# Altium PCB PCB1.PcbDoc (part 3 of 3)
Units mil, origin at the board's own origin, x right, y up, seen from the top; angles counter-clockwise.
Board outline 3935 x 3335 mil, 2 copper layers (Top Layer, Bottom Layer); 149 components, 220 nets, 928 pads, 357 vias.
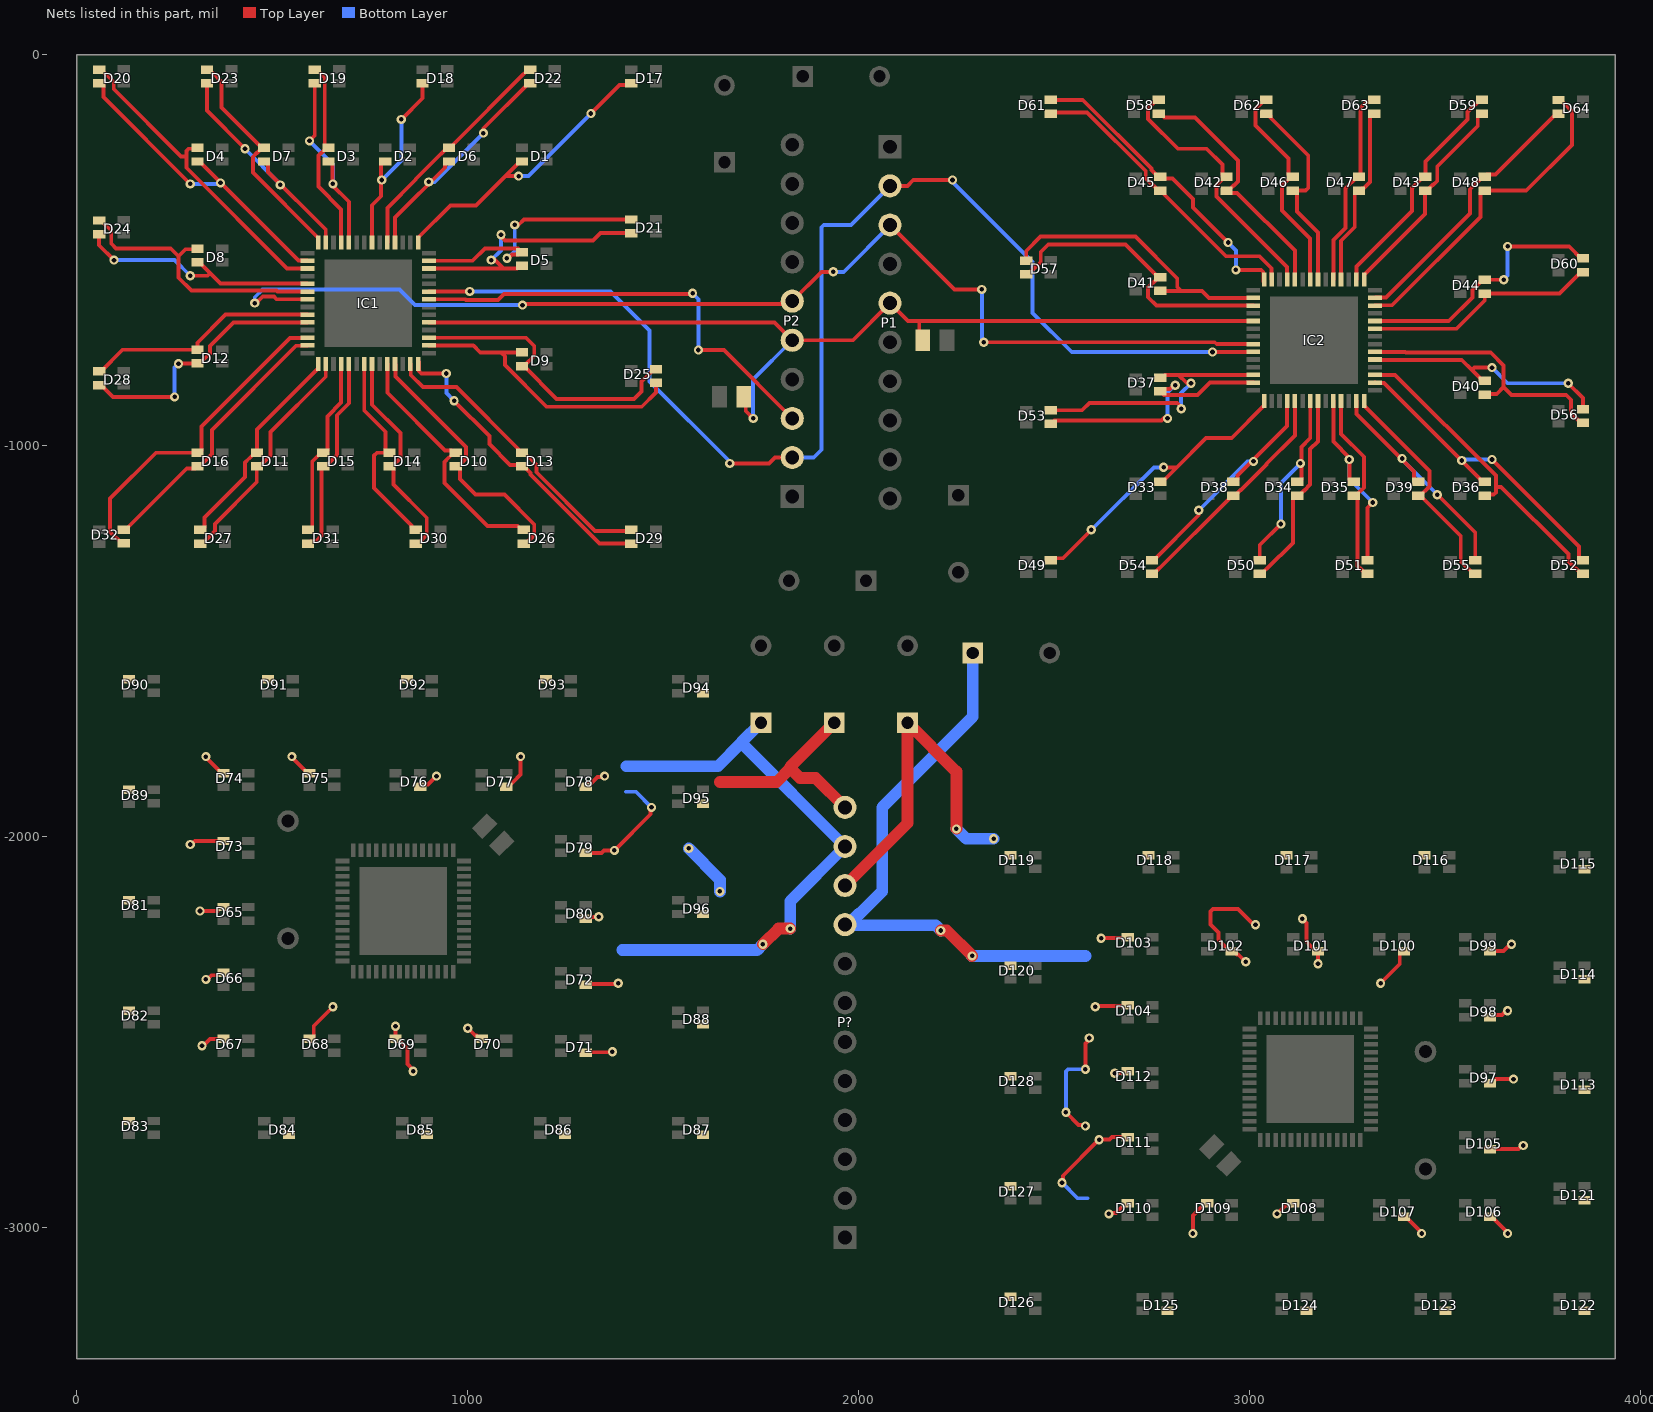
[diagram p3: the nets of this part, all layers, seen from the top]

## Via types
v1: diameter 23.62, hole 11.81, Top Layer to Bottom Layer, 357 vias

## Nets (pads, with @x,y where several pads share a name; then routed paths per layer and width w, separated by ;. In a path a pad name is that pad's centre, name@x,y a point inside that pad or via, vN(x,y) a via of type N, cw(c..) or ccw(c..) an arc to the next point about the centre after c; other vN are vias at no path point) (continued)
OUTG1_1: D34.2 D50.2 IC2.50 | length 513
  Top Layer w10: D50.2@3025.89,-1327.28 3030.82,-1327.28 3043.78,-1314.32 3044.57,-1314.32 3110.75,-1248.15 3110.75,-1133.11 3116.57,-1127.28 D34.2@3121.5,-1127.28 3126.42,-1127.28 3139.38,-1114.32 3140.17,-1114.32 3155,-1099.5 3155,-1008.33 3174.84,-988.49 IC2.50@3174.84,-885.51
OUTG2: D3.2 D19.2 IC1.53 | length 490.9
  Top Layer w10: D19.2@608.41,-37.72 613.33,-37.72 626.29,-50.68 627.08,-50.68 634.15,-57.75 634.15,-233.29 638.58,-237.72 625.62,-250.68 624.83,-250.68 617.76,-257.75 617.76,-337.06 676.1,-395.41 IC1.53@676.1,-479.49
OUTG2_1: D35.2 D51.2 IC2.53 | length 490.9
  Top Layer w10: IC2.53@3233.9,-885.51 3233.9,-969.59 3292.24,-1027.94 3292.24,-1107.25 3285.17,-1114.32 3284.38,-1114.32 3271.42,-1127.28 3275.85,-1131.71 3275.85,-1307.25 3282.92,-1314.32 3283.71,-1314.32 3296.67,-1327.28 D51.2@3301.59,-1327.28
OUTG3: D4.2 D20.2 IC1.3 | length 816.9
  Top Layer w10: D20.2@57.01,-37.72 61.93,-37.72 74.89,-50.68 75.68,-50.68 94.25,-69.24 94.25,-87.68 266.57,-260 280,-260 ; D4.2@308.5,-237.72 306.22,-240 285.86,-240 280,-245.86 280,-260 ; IC1.3@589.49,-546.42 537.63,-546.42 280,-288.79 280,-260
OUTG3_1: D36.2 D52.2 IC2.3 | length 816.9
  Top Layer w10: IC2.3@3320.51,-818.58 3372.37,-818.58 3630,-1076.21 3630,-1105 ; D36.2@3601.5,-1127.28 3603.78,-1125 3624.14,-1125 3630,-1119.14 3630,-1105 ; D52.2@3852.99,-1327.28 3848.07,-1327.28 3835.11,-1314.32 3834.31,-1314.32 3815.75,-1295.76 3815.75,-1277.32 3643.43,-1105 3630,-1105
OUTG4: D5.2 D21.2 IC1.41 | length 702.4
  Top Layer w10: IC1.41@900.51,-526.73 1011.78,-526.73 1043.51,-495 1129.12,-495 D5.2@1138.5,-504.38 ; v1(1100,-520) 1103.69,-520 1113.48,-510.21 1129.79,-510.21 D5.2@1135,-505 ; v1(1120,-435) 1120.86,-435.86 1129.14,-435.86 1143.95,-421.05 D21.2@1418.5,-421.05
  Bottom Layer w10: v1@1096.31,-525 v1@1100,-521.31 ; v1(1100,-520) v1@1100,-521.31 ; v1(1120,-435) 1120,-501.31 v1@1100,-521.31
OUTG4_1: D37.2 D53.2 IC2.41 | length 702.4
  Top Layer w10: D53.2@2491.5,-943.95 2500.45,-935 2775,-935 2780.86,-929.14 2789.14,-929.14 v1(2790,-930) ; D37.2@2771.5,-860.62 2780.88,-870 2866.49,-870 2898.22,-838.27 IC2.41@3009.49,-838.27 ; D37.2@2775,-860 2780.21,-854.79 2796.52,-854.79 2806.31,-845 v1(2810,-845)
  Bottom Layer w10: v1(2790,-930) 2790,-863.69 v1@2810,-843.69 ; v1(2810,-845) v1@2810,-843.69 ; v1@2813.69,-840 v1@2810,-843.69
OUTG5: D6.2 D22.2 IC1.47 | length 602.8
  Top Layer w10: IC1.47@794.21,-479.49 794.21,-391.63 866.81,-319.03 866.81,-317.2 932.12,-251.89 932.91,-251.89 947.09,-237.72 956.93,-237.72 962.76,-231.89 962.76,-229.05 1141.13,-50.68 1141.92,-50.68 1154.88,-37.72 D22.2@1159.8,-37.72
OUTG5_1: D38.2 D54.2 IC2.47 | length 602.8
  Top Layer w10: D54.2@2750.19,-1327.28 2755.12,-1327.28 2768.08,-1314.32 2768.87,-1314.32 2947.24,-1135.95 2947.24,-1133.11 2953.07,-1127.28 2962.91,-1127.28 2977.09,-1113.11 2977.88,-1113.11 3043.19,-1047.8 3043.19,-1045.97 3115.79,-973.37 IC2.47@3115.79,-885.51
OUTG6: D7.2 D23.2 IC1.56 | length 582.9
  Top Layer w10: D23.2@332.71,-37.72 337.63,-37.72 350.59,-50.68 351.38,-50.68 369.95,-69.24 369.95,-134.08 473.58,-237.72 460.62,-250.68 459.83,-250.68 450,-260.5 450,-300.63 617.05,-467.68 IC1.56@617.05,-479.49
OUTG6_1: D39.2 D55.2 IC2.56 | length 582.9
  Top Layer w10: IC2.56@3292.95,-885.51 3292.95,-897.32 3460,-1064.37 3460,-1104.5 3450.17,-1114.32 3449.38,-1114.32 3436.42,-1127.28 3540.05,-1230.92 3540.05,-1295.76 3558.62,-1314.32 3559.41,-1314.32 3572.37,-1327.28 D55.2@3577.29,-1327.28
OUTG7: D8.2 D24.2 IC1.6 | length 716.4
  Top Layer w10: D24.2@57.01,-423.62 61.93,-423.62 74.89,-436.58 75.68,-436.58 87.84,-448.74 87.84,-482.84 100,-495 240,-495 260,-515 ; D8.2@308.5,-496.05 307.31,-497.24 277.76,-497.24 260,-515 ; IC1.6@589.49,-605.47 512.53,-605.47 510.25,-603.19 293.19,-603.19 260,-570 260,-515
OUTG7_1: D40.2 D56.2 IC2.6 | length 716.4
  Top Layer w10: IC2.6@3320.51,-759.53 3397.47,-759.53 3399.75,-761.81 3616.81,-761.81 3650,-795 3650,-850 ; D40.2@3601.5,-868.95 3602.69,-867.76 3632.24,-867.76 3650,-850 ; D56.2@3852.99,-941.38 3848.07,-941.38 3835.11,-928.42 3834.31,-928.42 3822.16,-916.26 3822.16,-882.16 3810,-870 3670,-870 3650,-850
OUTG8: D9.2 D25.2 IC1.30 | length 752
  Top Layer w10: IC1.30@900.51,-743.27 1014.06,-743.27 1031.84,-761.05 1085.17,-761.05 ; D9.2@1138.5,-761.05 1085.17,-761.05 ; D25.2@1481.5,-838.95 1481.5,-863.5 1445,-900 1201.74,-900 1095,-793.26 1095,-770.88 1085.17,-761.05
OUTG8_1: D41.2 D57.2 IC2.30 | length 752
  Top Layer w10: D57.2@2428.5,-526.05 2428.5,-501.5 2465,-465 2708.26,-465 2815,-571.74 2815,-594.12 2824.83,-603.95 ; D41.2@2771.5,-603.95 2824.83,-603.95 ; IC2.30@3009.49,-621.73 2895.94,-621.73 2878.16,-603.95 2824.83,-603.95
OUTG9: D10.2 D26.2 IC1.24 | length 652.5
  Top Layer w10: IC1.24@794.21,-790.51 794.21,-864.21 941.89,-1011.89 958.36,-1011.89 D10.2@964.18,-1017.72 ; D10.2@969.1,-1017.72 D10.2@964.18,-1017.72 ; D26.2@1142.8,-1215 1137.88,-1215 1127.88,-1205 1050,-1205 940,-1095 940,-1041.1 950.43,-1030.68 951.22,-1030.68 D10.2@964.18,-1017.72
OUTG9_1: D42.2 D58.2 IC2.24 | length 652.5
  Top Layer w10: D58.2@2767.19,-150 2772.12,-150 2782.12,-160 2860,-160 2970,-270 2970,-323.9 2959.57,-334.32 2958.78,-334.32 D42.2@2945.82,-347.28 ; D42.2@2940.9,-347.28 D42.2@2945.82,-347.28 ; IC2.24@3115.79,-574.49 3115.79,-500.79 2968.11,-353.11 2951.64,-353.11 D42.2@2945.82,-347.28
OUTG10: D11.2 D27.2 IC1.15 | length 555.5
  Top Layer w10: D27.2@315.71,-1215 320.63,-1215 326.46,-1209.17 326.46,-1183.54 430,-1080 430,-1042.9 441.01,-1031.89 441.81,-1031.89 455.98,-1017.72 D11.2@460.9,-1017.72 460.9,-958.47 617.05,-802.32 IC1.15@617.05,-790.51
OUTG10_1: D43.2 D59.2 IC2.15 | length 555.5
  Top Layer w10: IC2.15@3292.95,-574.49 3292.95,-562.68 3449.1,-406.53 D43.2@3449.1,-347.28 3454.02,-347.28 3468.19,-333.11 3468.99,-333.11 3480,-322.1 3480,-285 3583.54,-181.46 3583.54,-155.83 3589.37,-150 D59.2@3594.29,-150
OUTG11: D12.2 D28.2 IC1.9 | length 603
  Top Layer w10: D28.2@57.01,-809.53 61.93,-809.53 117.07,-754.38 D12.2@308.5,-754.38 308.5,-736.5 380.47,-664.53 IC1.9@589.49,-664.53
OUTG11_1: D44.2 D60.2 IC2.9 | length 603
  Top Layer w10: IC2.9@3320.51,-700.47 3529.53,-700.47 3601.5,-628.5 D44.2@3601.5,-610.62 3792.93,-610.62 3848.07,-555.47 D60.2@3852.99,-555.47
OUTG12: D13.2 D29.2 IC1.27 | length 769.8
  Top Layer w10: IC1.27@853.27,-790.51 854.17,-791.42 854.17,-819.17 885,-850 970.79,-850 D13.2@1138.5,-1017.72 ; D13.2@1140,-1015 1140.71,-1015 1157.6,-1031.89 1158.39,-1031.89 1175.75,-1049.24 1175.75,-1067.68 1325.56,-1217.5 1416,-1217.5 D29.2@1418.5,-1215
OUTG12_1: D45.2 D61.2 IC2.27 | length 769.8
  Top Layer w10: D61.2@2491.5,-150 2494,-147.5 2584.44,-147.5 2734.25,-297.32 2734.25,-315.76 2751.61,-333.11 2752.4,-333.11 2769.29,-350 D45.2@2770,-350 ; D45.2@2771.5,-347.28 2939.21,-515 3025,-515 3055.83,-545.83 3055.83,-573.58 IC2.27@3056.73,-574.49
OUTG13: D14.2 D30.2 IC1.21 | length 526.9
  Top Layer w10: IC1.21@735.16,-790.51 735.16,-910.16 788.96,-963.96 788.96,-1011.89 794.78,-1017.72 767.28,-1017.72 760,-1025 760,-1107.89 856.36,-1204.25 856.36,-1209.17 862.18,-1215 D30.2@867.11,-1215
OUTG13_1: D46.2 D62.2 IC2.21 | length 526.9
  Top Layer w10: D62.2@3042.89,-150 3047.82,-150 3053.64,-155.83 3053.64,-160.75 3150,-257.11 3150,-340 3142.72,-347.28 3115.22,-347.28 3121.04,-353.11 3121.04,-401.04 3174.84,-454.84 IC2.21@3174.84,-574.49
OUTG14: D15.2 D31.2 IC1.18 | length 468.7
  Top Layer w10: D31.2@591.41,-1215 596.33,-1215 602.15,-1209.17 602.15,-1040.15 618.76,-1023.54 624.48,-1023.54 D15.2@630.3,-1017.72 635.23,-1017.72 641.05,-1011.89 641.05,-924.63 676.1,-889.58 IC1.18@676.1,-790.51
OUTG14_1: D47.2 D63.2 IC2.18 | length 468.7
  Top Layer w10: IC2.18@3233.9,-574.49 3233.9,-475.42 3268.95,-440.37 3268.95,-353.11 3274.77,-347.28 D47.2@3279.7,-347.28 3285.52,-341.46 3291.24,-341.46 3307.85,-324.85 3307.85,-155.83 3313.67,-150 D63.2@3318.59,-150
OUTG15: D16.2 D32.2 IC1.12 | length 843.1
  Top Layer w10: D32.2@120,-1249.57 115.08,-1249.57 102.12,-1236.61 101.32,-1236.61 85,-1220.28 85,-1135 202.28,-1017.72 D16.2@308.5,-1017.72 313.43,-1017.72 319.25,-1011.89 319.25,-950.75 545.51,-724.49 588.58,-724.49 IC1.12@589.49,-723.58
OUTG15_1: D48.2 D64.2 IC2.12 | length 843.1
  Top Layer w10: IC2.12@3320.51,-641.42 3321.42,-640.51 3364.49,-640.51 3590.75,-414.25 3590.75,-353.11 3596.57,-347.28 D48.2@3601.5,-347.28 3707.72,-347.28 3825,-230 3825,-144.72 3808.68,-128.39 3807.88,-128.39 3794.92,-115.43 D64.2@3790,-115.43
OUTR0: D1.1 D17.1 IC1.43 | length 778.6
  Top Layer w10: IC1.43@872.95,-479.49 872.95,-467.68 955.63,-385 1021.3,-385 1096.3,-310 ; v1(1130,-310) 1096.3,-310 ; D1.1@1138.5,-272.72 1133.58,-272.72 1096.3,-310 ; v1(1315,-150) 1387.76,-77.24 1413.98,-77.24 D17.1@1418.5,-72.72
  Bottom Layer w10: v1(1130,-310) 1155,-310 v1(1315,-150)
OUTR0_1: D33.1 D49.1 IC2.43 | length 778.6
  Top Layer w10: D49.1@2491.5,-1292.28 2496.02,-1287.76 2522.24,-1287.76 v1(2595,-1215) ; D33.1@2771.5,-1092.28 2776.42,-1092.28 2813.7,-1055 ; v1(2780,-1055) 2813.7,-1055 ; IC2.43@3037.05,-885.51 3037.05,-897.32 2954.37,-980 2888.7,-980 2813.7,-1055
  Bottom Layer w10: v1(2595,-1215) 2755,-1055 v1(2780,-1055)
OUTR1: D2.1 D18.1 IC1.49 | length 514
  Top Layer w10: IC1.49@754.84,-479.49 754.84,-384.57 777.76,-361.65 777.76,-278.54 783.58,-272.72 D2.1@788.5,-272.72 ; v1(830,-165) 884.11,-110.89 D18.1@884.11,-72.72
  Bottom Layer w10: v1(780,-320) 830,-270 v1(830,-165)
OUTR1_1: D34.1 D50.1 IC2.49 | length 514
  Top Layer w10: D50.1@3025.89,-1292.28 3025.89,-1254.11 v1(3080,-1200) ; D34.1@3121.5,-1092.28 3126.42,-1092.28 3132.24,-1086.46 3132.24,-1045 3132.24,-1003.35 3155.16,-980.43 IC2.49@3155.16,-885.51
  Bottom Layer w10: v1(3080,-1200) 3080,-1095 v1(3130,-1045)
OUTR2: D3.1 D19.1 IC1.52 | length 519
  Top Layer w10: v1(595,-220) 608.41,-206.59 D19.1@608.41,-72.72 ; D3.1@643.5,-272.72 648.43,-272.72 654.25,-278.54 654.25,-334.25 695.79,-375.79 IC1.52@695.79,-479.49
  Bottom Layer w10: v1(595,-220) 655,-280 v1(655,-330)
OUTR2_1: D35.1 D51.1 IC2.52 | length 519
  Top Layer w10: IC2.52@3214.21,-885.51 3214.21,-989.21 3255.75,-1030.75 3255.75,-1086.46 3261.57,-1092.28 D35.1@3266.5,-1092.28 ; D51.1@3301.59,-1292.28 3301.59,-1158.41 v1(3315,-1145)
  Bottom Layer w10: v1(3255,-1035) 3255,-1085 v1(3315,-1145)
OUTR3: D4.1 D20.1 IC1.2 | length 824.9
  Top Layer w10: D20.1@57.01,-72.72 61.93,-72.72 67.76,-78.54 67.76,-107.76 v1(290,-330) ; D4.1@308.5,-272.72 313.43,-272.72 566.54,-525.83 588.58,-525.83 IC1.2@589.49,-526.73
  Bottom Layer w10: v1(290,-330) 365,-330 v1@370,-325
  other v1: 367.5,-327.5
OUTR3_1: D36.1 D52.1 IC2.2 | length 824.9
  Top Layer w10: IC2.2@3320.51,-838.27 3321.42,-839.17 3343.46,-839.17 3542.15,-1037.85 3596.57,-1092.28 D36.1@3601.5,-1092.28 ; v1(3620,-1035) 3842.24,-1257.24 3842.24,-1286.46 3848.07,-1292.28 D52.1@3852.99,-1292.28
  Bottom Layer w10: v1@3540,-1040 3545,-1035 v1(3620,-1035)
  other v1: 3542.5,-1037.5
OUTR4: D5.1 D21.1 IC1.40 | length 707
  Top Layer w10: IC1.40@900.51,-546.42 1091.42,-546.42 ; v1(1060,-525) 1070,-525 1091.42,-546.42 ; v1(1085,-460) 1085,-465 1095,-475 1320,-475 1338.95,-456.05 D21.1@1418.5,-456.05 ; D5.1@1138.5,-539.38 1133.58,-539.38 1126.55,-546.42 1091.42,-546.42
  Bottom Layer w10: v1(1060,-525) 1085,-500 v1(1085,-460)
OUTR4_1: D37.1 D53.1 IC2.40 | length 707
  Top Layer w10: D53.1@2491.5,-908.95 2571.05,-908.95 2590,-890 2815,-890 2825,-900 v1(2825,-905) ; D37.1@2771.5,-825.62 2776.42,-825.62 2783.45,-818.58 2818.58,-818.58 ; v1(2850,-840) 2840,-840 2818.58,-818.58 ; IC2.40@3009.49,-818.58 2818.58,-818.58
  Bottom Layer w10: v1(2825,-905) 2825,-865 v1(2850,-840)
OUTR5: D6.1 D22.1 IC1.46 | length 638.4
  Top Layer w10: IC1.46@813.9,-479.49 813.9,-416.1 941.26,-288.74 941.26,-278.54 947.09,-272.72 D6.1@952.01,-272.72 ; v1(1040,-200) 1040,-187.6 1154.88,-72.72 D22.1@1159.8,-72.72
  Bottom Layer w10: v1(900,-325) 915,-325 v1(1040,-200)
OUTR5_1: D38.1 D54.1 IC2.46 | length 638.4
  Top Layer w10: D54.1@2750.19,-1292.28 2755.12,-1292.28 2870,-1177.4 v1(2870,-1165) ; D38.1@2957.99,-1092.28 2962.91,-1092.28 2968.74,-1086.46 2968.74,-1076.26 3007.5,-1037.5 3096.1,-948.9 IC2.46@3096.1,-885.51
  Bottom Layer w10: v1(2870,-1165) 2995,-1040 v1(3010,-1040)
OUTR6: D7.1 D23.1 IC1.55 | length 615.1
  Top Layer w10: D23.1@332.71,-72.72 332.71,-142.71 v1(430,-240) ; D7.1@478.5,-272.72 483.43,-272.72 489.25,-278.54 489.25,-299.37 636.65,-446.77 636.65,-479.41 IC1.55@636.73,-479.49
  Bottom Layer w10: v1(430,-240) 520,-330 v1@520,-335
  other v1: 520,-332.5
OUTR6_1: D39.1 D55.1 IC2.55 | length 615.1
  Top Layer w10: IC2.55@3273.27,-885.51 3273.35,-885.59 3273.35,-918.23 3388.81,-1033.69 3420.75,-1065.63 3420.75,-1086.46 3426.57,-1092.28 D39.1@3431.5,-1092.28 ; v1(3480,-1125) 3577.29,-1222.29 D55.1@3577.29,-1292.28
  Bottom Layer w10: v1@3390,-1030 3390,-1035 v1(3480,-1125)
  other v1: 3390,-1032.5
OUTR7: D8.1 D24.1 IC1.5 | length 650.9
  Top Layer w10: D24.1@57.01,-458.62 57.01,-487.01 v1(95,-525) ; v1(290,-565) 334.21,-565 340.79,-558.42 ; D8.1@308.5,-531.05 313.43,-531.05 340.79,-558.42 ; IC1.5@589.49,-585.79 588.7,-585 367.37,-585 340.79,-558.42
  Bottom Layer w10: v1(95,-525) 250,-525 v1(290,-565)
OUTR7_1: D40.1 D56.1 IC2.5 | length 650.9
  Top Layer w10: IC2.5@3320.51,-779.21 3321.3,-780 3542.63,-780 3569.21,-806.58 ; D40.1@3601.5,-833.95 3596.57,-833.95 3569.21,-806.58 ; v1(3620,-800) 3575.79,-800 3569.21,-806.58 ; v1(3815,-840) 3852.99,-877.99 D56.1@3852.99,-906.38
  Bottom Layer w10: v1(3620,-800) 3660,-840 v1(3815,-840)
OUTR8: D9.1 D25.1 IC1.31 | length 765
  Top Layer w10: IC1.31@900.51,-723.58 1148.58,-723.58 1170,-745 1170,-770.27 1157.18,-783.09 1156.39,-783.09 D9.1@1143.43,-796.05 ; D9.1@1138.5,-796.05 D9.1@1143.43,-796.05 ; D25.1@1481.5,-803.95 1476.57,-803.95 1463.61,-816.91 1462.82,-816.91 1444.25,-835.48 1444.25,-860.75 1425,-880 1227.38,-880 D9.1@1143.43,-796.05
OUTR8_1: D41.1 D57.1 IC2.31 | length 765
  Top Layer w10: D57.1@2428.5,-561.05 2433.43,-561.05 2446.39,-548.09 2447.18,-548.09 2465.75,-529.52 2465.75,-504.25 2485,-485 2682.62,-485 D41.1@2766.57,-568.95 ; D41.1@2771.5,-568.95 D41.1@2766.57,-568.95 ; IC2.31@3009.49,-641.42 2761.42,-641.42 2740,-620 2740,-594.73 2752.82,-581.91 2753.61,-581.91 D41.1@2766.57,-568.95
OUTR9: D10.1 D26.1 IC1.25 | length 687.4
  Top Layer w10: IC1.25@813.9,-790.51 814.8,-791.42 814.8,-822.7 995,-1002.89 995,-1032.54 987.78,-1039.76 986.99,-1039.76 D10.1@974.03,-1052.72 ; D10.1@969.1,-1052.72 D10.1@974.03,-1052.72 ; D26.1@1142.8,-1250 1147.73,-1250 1160.69,-1237.04 1161.48,-1237.04 1170,-1228.52 1170,-1201.48 1093.52,-1125 1020,-1125 979.85,-1084.85 979.85,-1058.54 D10.1@974.03,-1052.72
OUTR9_1: D42.1 D58.1 IC2.25 | length 687.4
  Top Layer w10: D58.1@2767.19,-115 2762.27,-115 2749.31,-127.96 2748.52,-127.96 2740,-136.48 2740,-163.52 2816.48,-240 2890,-240 2930.15,-280.15 2930.15,-306.46 D42.1@2935.97,-312.28 ; D42.1@2940.9,-312.28 D42.1@2935.97,-312.28 ; IC2.25@3096.1,-574.49 3095.2,-573.58 3095.2,-542.3 2915,-362.11 2915,-332.46 2922.22,-325.24 2923.01,-325.24 D42.1@2935.97,-312.28
OUTR10: D11.1 D27.1 IC1.16 | length 599.2
  Top Layer w10: D27.1@315.71,-1250 320.63,-1250 333.59,-1237.04 334.38,-1237.04 352.95,-1218.47 352.95,-1199.6 460,-1092.55 460,-1053.62 D11.1@460.9,-1052.72 465.83,-1052.72 478.79,-1039.76 479.58,-1039.76 494.79,-1024.55 494.79,-965.21 636.73,-823.27 IC1.16@636.73,-790.51
OUTR10_1: D43.1 D59.1 IC2.16 | length 599.2
  Top Layer w10: IC2.16@3273.27,-574.49 3273.27,-541.73 3415.21,-399.79 3415.21,-340.45 3430.42,-325.24 3431.21,-325.24 3444.17,-312.28 D43.1@3449.1,-312.28 3450,-311.38 3450,-272.45 3557.05,-165.4 3557.05,-146.53 3575.61,-127.96 3576.41,-127.96 3589.37,-115 D59.1@3594.29,-115
OUTR11: D12.1 D28.1 IC1.10 | length 679.1
  Top Layer w10: D28.1@57.01,-844.53 61.93,-844.53 92.4,-875 v1(250,-875) ; v1(260,-790) 260.31,-789.69 308.2,-789.69 D12.1@308.5,-789.38 313.43,-789.38 327.6,-775.21 328.39,-775.21 340,-763.6 340,-744.73 400.52,-684.21 IC1.10@589.49,-684.21
  Bottom Layer w10: v1(250,-875) 250,-800 v1(260,-790)
OUTR11_1: D44.1 D60.1 IC2.10 | length 679.1
  Top Layer w10: IC2.10@3320.51,-680.79 3509.48,-680.79 3570,-620.27 3570,-601.4 3581.61,-589.79 3582.4,-589.79 3596.57,-575.62 D44.1@3601.5,-575.62 3601.8,-575.31 3649.69,-575.31 v1(3650,-575) ; v1(3660,-490) 3817.6,-490 3848.07,-520.47 D60.1@3852.99,-520.47
  Bottom Layer w10: v1(3650,-575) 3660,-565 v1(3660,-490)
OUTR12: D13.1 D29.1 IC1.28 | length 794
  Top Layer w10: IC1.28@875,-785 875,-809.14 880.86,-815 v1(945,-815) ; v1(965,-885) 1055,-975 1055,-995.85 1107.76,-1048.6 1134.39,-1048.6 D13.1@1138.5,-1052.72 1143.43,-1052.72 1160.75,-1070.04 1160.75,-1073.9 1336.85,-1250 D29.1@1418.5,-1250
  Bottom Layer w10: v1(945,-815) 945,-865 v1(965,-885)
OUTR12_1: D45.1 D61.1 IC2.28 | length 794
  Top Layer w10: D61.1@2491.5,-115 2573.15,-115 2749.25,-291.1 2749.25,-294.96 2766.57,-312.28 D45.1@2771.5,-312.28 2775.61,-316.4 2802.24,-316.4 2855,-369.15 2855,-390 v1(2945,-480) ; v1(2965,-550) 3029.14,-550 3035,-555.86 3035,-574.49 IC2.28@3035,-580
  Bottom Layer w10: v1(2945,-480) 2965,-500 v1(2965,-550)
OUTR13: D14.1 D30.1 IC1.22 | length 556.7
  Top Layer w10: IC1.22@754.84,-790.51 755,-790.67 755,-895 827.43,-967.43 827.43,-1030.71 818.38,-1039.76 817.59,-1039.76 D14.1@804.63,-1052.72 ; D14.1@799.7,-1052.72 D14.1@804.63,-1052.72 ; D30.1@867.11,-1250 872.03,-1250 884.99,-1237.04 885.78,-1237.04 895,-1227.82 895,-1184.05 810.45,-1099.5 810.45,-1058.54 D14.1@804.63,-1052.72
OUTR13_1: D46.1 D62.1 IC2.22 | length 556.7
  Top Layer w10: D62.1@3042.89,-115 3037.97,-115 3025.01,-127.96 3024.22,-127.96 3015,-137.18 3015,-180.95 3099.55,-265.5 3099.55,-306.46 D46.1@3105.37,-312.28 ; D46.1@3110.3,-312.28 D46.1@3105.37,-312.28 ; IC2.22@3155.16,-574.49 3155,-574.33 3155,-470 3082.57,-397.57 3082.57,-334.29 3091.62,-325.24 3092.41,-325.24 D46.1@3105.37,-312.28
OUTR14: D15.1 D31.1 IC1.19 | length 517.1
  Top Layer w10: D31.1@591.41,-1250 597.23,-1244.17 611.53,-1244.17 625.83,-1229.88 625.83,-1052.72 D15.1@630.3,-1052.72 635.23,-1052.72 648.19,-1039.76 648.98,-1039.76 665,-1023.74 665,-921.9 695.79,-891.11 IC1.19@695.79,-790.51
OUTR14_1: D47.1 D63.1 IC2.19 | length 517.1
  Top Layer w10: IC2.19@3214.21,-574.49 3214.21,-473.89 3245,-443.1 3245,-341.26 3261.02,-325.24 3261.81,-325.24 3274.77,-312.28 D47.1@3279.7,-312.28 3284.17,-312.28 3284.17,-135.12 3298.47,-120.83 3312.77,-120.83 D63.1@3318.59,-115
OUTR15: D16.1 D32.1 IC1.13 | length 701
  Top Layer w10: D32.1@120,-1214.57 124.92,-1214.57 280.94,-1058.54 302.68,-1058.54 D16.1@308.5,-1052.72 313.43,-1052.72 326.39,-1039.76 327.18,-1039.76 345.75,-1021.19 345.75,-959.25 560.83,-744.17 588.58,-744.17 IC1.13@589.49,-743.27
OUTR15_1: D48.1 D64.1 IC2.13 | length 701
  Top Layer w10: IC2.13@3320.51,-621.73 3321.42,-620.83 3349.17,-620.83 3564.25,-405.75 3564.25,-343.81 3582.82,-325.24 3583.61,-325.24 3596.57,-312.28 D48.1@3601.5,-312.28 3607.32,-306.46 3629.06,-306.46 3785.08,-150.43 D64.1@3790,-150.43
SCLK: IC1.37 IC2.37 P1.2 P2.2 | length 3287
  Top Layer w10: IC1.37@900.51,-605.47 900.75,-605.24 1004.76,-605.24 v1(1005,-605) ; v1(1670,-1045) 1770.47,-1045 1785.47,-1030 P2.2@1830,-1030 P2.2@1835,-1030 ; P1.2@2075,-335 P1.2@2080,-335 2124.53,-335 2139.53,-320 v1(2240,-320) ; v1(2905,-760) 2905.24,-759.76 3009.25,-759.76 IC2.37@3009.49,-759.53
  Bottom Layer w10: v1(1005,-605) 1365,-605 1465,-705 1465,-835 1670,-1040 v1(1670,-1045) ; P2.2@1825,-1045 1840,-1030 1885,-1030 1905,-1010 1905,-440.86 1910.86,-435 1980,-435 P1.2@2080,-335 ; v1(2240,-320) 2240,-325 2445,-530 2445,-660 2545,-760 v1(2905,-760)
SIN: IC1.36 P2.3 | length 1146.4
  Top Layer w10: IC1.36@900,-625 900.16,-625.16 IC1.36@900.51,-625.16 994.01,-625.16 995.66,-626.81 1077.34,-626.81 1092.34,-611.81 1573.19,-611.81 v1(1575,-610) ; v1(1590,-755) 1655,-755 P2.3@1830,-930
  Bottom Layer w10: v1(1575,-610) 1590,-625 v1(1590,-755)
SOUT: IC1.7 IC2.36 P1.3 P2.6 | length 3041.1
  Top Layer w10: v1(455,-635) 458.69,-635 475.5,-618.19 504.03,-618.19 511,-625.16 IC1.7@589.49,-625.16 ; v1(1140,-640) 1142.61,-637.39 1822.61,-637.39 P2.6@1830,-630 1905,-555 v1(1935,-555) ; P1.3@2080,-435 2245,-600 v1(2315,-600) ; v1(2320,-735) 2910.85,-735 2915.85,-740 3009.33,-740 IC2.36@3009.49,-739.84
  Bottom Layer w10: v1@455,-640 v1(455,-635) 455,-620 475,-600 825,-600 865,-640 v1(1140,-640) ; v1(1935,-555) 1961.81,-555 2081.81,-435 P1.3@2090,-435 ; v1(2315,-600) 2315,-726.31 2320,-731.31 v1(2320,-735)
V1: C8.1 D97.4 D98.4 D99.4 D100.4 D101.4 D102.4 D103.4 D104.4 D105.4 D106.4 D107.4 D108.4 D109.4 D110.4 D111.4 D112.4 P?.9 | length 3448.9
  Top Layer w10: v1(2520,-2885) 2522.61,-2882.39 2522.61,-2867.39 v1(2615,-2775) 2641.81,-2775 2648.28,-2768.53 D111.4@2688.5,-2768.53 ; v1(2530,-2705) 2562.39,-2737.39 2577.39,-2737.39 v1(2580,-2740) ; v1(2580,-2595) 2580,-2528.69 2590,-2518.69 v1(2590,-2515) ; v1(2605,-2435) 2606.98,-2433.02 2686.52,-2433.02 D104.4@2688.5,-2431.03 ; v1(2620,-2260) 2621.36,-2258.64 2687.15,-2258.64 D103.4@2688.5,-2257.28 ; v1(2640,-2965) 2642.61,-2962.39 2658.11,-2962.39 2677.39,-2943.11 2682.68,-2943.11 D110.4@2688.5,-2937.28 ; v1(2655,-2605) 2683.29,-2605 D112.4@2688.5,-2599.78 ; v1(2855,-3015) 2855,-2968.63 2872.95,-2950.68 2873.32,-2950.68 2886.71,-2937.28 D109.4@2891.63,-2937.28 ; v1(2990,-2320) 2971.04,-2301.04 2967.87,-2301.04 2959.54,-2292.72 D102.4@2954.62,-2292.72 2949.7,-2292.72 2936.31,-2279.32 2935.95,-2279.32 2920.1,-2263.48 2920.1,-2245.1 2900,-2225 2900,-2190.86 2905.86,-2185 2970,-2185 3010,-2225 v1(3015,-2225) ; v1(3070,-2965) 3091.89,-2943.11 3105.93,-2943.11 D108.4@3111.76,-2937.28 ; v1(3135,-2210) 3145.54,-2220.54 3145.54,-2268.79 3156.07,-2279.32 3156.43,-2279.32 3169.83,-2292.72 D101.4@3174.75,-2292.72 3175,-2292.97 v1(3175,-2325) ; v1(3335,-2375) 3384.13,-2325.87 3384.13,-2298.54 3389.95,-2292.72 D100.4@3394.87,-2292.72 ; D107.4@3394.87,-2972.72 3399.8,-2972.72 3440,-3012.92 v1(3440,-3015) ; D106.4@3615,-2972.72 3619.92,-2972.72 3660,-3012.8 v1(3660,-3015) ; D105.4@3615,-2798.97 3687.35,-2798.97 3696.31,-2790 v1(3700,-2790) ; D97.4@3615,-2630.22 3620.83,-2624.39 3626.11,-2624.39 3630.5,-2620 v1(3675,-2620) ; D98.4@3615,-2461.47 3620.83,-2455.64 3645.67,-2455.64 3656.31,-2445 v1(3660,-2445) ; D99.4@3615,-2292.72 3649.8,-2292.72 3667.52,-2275 v1(3670,-2275)
  Top Layer w30: v1(2210,-2240) 2225,-2240 v1(2290,-2305)
  Bottom Layer w10: v1(2520,-2885) 2560,-2925 2585,-2925 ; v1(2530,-2705) 2530,-2600.86 2535.86,-2595 v1(2580,-2595)
  Bottom Layer w30: P?.9@1960,-2225 1961.81,-2226.81 2196.81,-2226.81 v1(2210,-2240) ; P?.9@1965,-2225 1972.86,-2225 2001.65,-2196.21 2003.79,-2196.21 2060,-2140 2060,-1925 2291.57,-1693.43 C8.1@2291.57,-1530 ; v1(2290,-2305) 2580,-2305
V2: C7.1 D113.4 D114.4 D115.4 D116.4 D117.4 D118.4 D119.4 D120.4 D121.4 D122.4 D123.4 D124.4 D125.4 D126.4 D127.4 D128.4 P?.10 | length 911.6
  Top Layer w30: P?.10@1965,-2125 2125,-1965 C7.1@2125,-1708.43 2250,-1833.43 v1(2250,-1980)
  Bottom Layer w30: v1(2250,-1980) 2275,-2005 v1(2345,-2005)
V3: C10.1 D65.4 D66.4 D67.4 D68.4 D69.4 D70.4 D71.4 D72.4 D73.4 D74.4 D75.4 D76.4 D77.4 D78.4 D79.4 D80.4 P?.11 | length 2886
  Top Layer w10: v1(290,-2020) 293.69,-2020 302.65,-2011.03 D73.4@375,-2011.03 ; v1(315,-2190) 359.5,-2190 363.89,-2185.61 369.17,-2185.61 D65.4@375,-2179.78 ; v1(320,-2535) 322.48,-2535 340.2,-2517.28 D67.4@375,-2517.28 ; v1(330,-2365) 333.69,-2365 344.33,-2354.36 369.17,-2354.36 D66.4@375,-2348.53 ; v1(330,-1795) 330,-1797.2 370.08,-1837.28 D74.4@375,-1837.28 ; v1(550,-1795) 550,-1797.08 590.2,-1837.28 D75.4@595.13,-1837.28 ; D68.4@595.13,-2517.28 600.05,-2517.28 605.87,-2511.46 605.87,-2484.13 v1(655,-2435) ; v1(815,-2485) 815,-2517.03 D69.4@815.25,-2517.28 820.17,-2517.28 833.57,-2530.68 833.93,-2530.68 845.66,-2542.41 845.66,-2581.98 860,-2596.31 v1(860,-2600) ; D76.4@878.24,-1872.72 884.07,-1866.89 898.11,-1866.89 v1(920,-1845) ; v1(1000,-2490) 1018.96,-2508.96 1022.13,-2508.96 1030.46,-2517.28 D70.4@1035.38,-2517.28 ; D77.4@1098.37,-1872.72 1103.29,-1872.72 1116.68,-1859.32 1117.05,-1859.32 1135,-1841.37 v1(1135,-1795) ; D71.4@1301.5,-2552.72 1302.85,-2551.36 1368.64,-2551.36 v1(1370,-2550) ; D72.4@1301.5,-2378.97 1303.48,-2376.98 1383.02,-2376.98 v1(1385,-2375) ; D80.4@1301.5,-2210.22 1306.71,-2205 v1(1335,-2205) ; D79.4@1301.5,-2041.47 1341.72,-2041.47 1348.19,-2035 v1(1375,-2035) 1467.39,-1942.61 1467.39,-1927.61 v1(1470,-1925) ; D78.4@1301.5,-1872.72 1307.32,-1866.89 1312.61,-1866.89 1331.89,-1847.61 1347.39,-1847.61 v1(1350,-1845)
  Top Layer w30: v1(1755,-2275) 1795,-2235 v1(1825,-2235)
  Bottom Layer w10: 1405,-1885 1430,-1885 v1(1470,-1925)
  Bottom Layer w30: 1395,-2290 1740,-2290 v1(1755,-2275) ; 1405,-1820 1640,-1820 1700,-1760 ; C10.1@1750,-1705 C10.1@1750,-1708.43 1700,-1758.43 1700,-1760 ; v1(1825,-2235) 1825,-2165 P?.11@1965,-2025 1700,-1760
V4: C11.1 D81.4 D82.4 D83.4 D84.4 D85.4 D86.4 D87.4 D88.4 D89.4 D90.4 D91.4 D92.4 D93.4 D94.4 D95.4 D96.4 P?.12 | length 686.7
  Top Layer w30: 1645,-1860 1790,-1860 1825,-1825 ; C11.1@1940,-1705 1940,-1705.93 C11.1@1937.5,-1708.43 1825,-1820.93 1825,-1825 ; P?.12@1965,-1925 1890,-1850 1850,-1850 1825,-1825
  Bottom Layer w30: v1(1565,-2030) 1645,-2110 v1(1645,-2140)
VCC: C3.2 C6.2 IC1.33 IC2.33 P1.5 P2.5 | length 2549.2
  Top Layer w10: IC1.33@900.51,-684.21 1784.21,-684.21 1825,-725 P2.5@1825,-730 ; C6.2@1706.1,-875 1711.04,-879.94 1711.04,-911.04 v1(1730,-930) ; P2.5@1830,-730 1985,-730 P1.5@2080,-635 P1.5@2085,-630 ; P1.5@2085,-635 2085,-640 2125.79,-680.79 2155,-680.79 IC2.33@3009.49,-680.79 ; 2155,-685 2155,-721.1 C3.2@2163.9,-730
  Bottom Layer w10: v1(1730,-930) 1730,-830 P2.5@1830,-730 P2.5@1830,-725
pads on no net: D1. D2. D3. D4. D5. D6. D7. D8. D9. D10. D11. D12. D13. D14. D15. D16. D17. D18. D19. D20. D21. D22. D23. D24. D25. D26. D27. D28. D29. D30. D31. D32. D33. D34. D35. D36. D37. D38. D39. D40. D41. D42. D43. D44. D45. D46. D47. D48. D49. D50. D51. D52. D53. D54. D55. D56. D57. D58. D59. D60. D61. D62. D63. D64. D65. D66. D67. D68. D69. D70. D71. D72. D73. D74. D75. D76. D77. D78. D79. D80. D81. D82. D83. D84. D85. D86. D87. D88. D89. D90. D91. D92. D93. D94. D95. D96. D97. D98. D99. D100. D101. D102. D103. D104. D105. D106. D107. D108. D109. D110. D111. D112. D113. D114. D115. D116. D117. D118. D119. D120. D121. D122. D123. D124. D125. D126. D127. D128. P1.9 P2.9 P?.6
copper on no net: | length 143.1
  Bottom Layer w30: v1(2345,-2670) 2345,-2700 v1(2425,-2780)

## Polygon pours and split planes (outlines as drawn)
V1 on Bottom Layer "Bottom Layer-V1" (solid, pour order 106): 2560,-2840 2560,-2390 2825,-2390 2825,-2840
V1 on Bottom Layer "Bottom Layer-V1 1" (solid, pour order 108): 3735,-3035 2560,-3035 2560,-2840 3735,-2840
V1 on Bottom Layer "Bottom Layer-V1 2" (solid, pour order 114): 3735,-2840 3490,-2840 3490,-2165 3730,-2165
V1 on Bottom Layer "Bottom Layer-V1 3" (solid, pour order 112): 3490,-2165 2560,-2165 2560,-2390 3490,-2390
1_GND on Bottom Layer "Bottom Layer-1_GND" (solid, pour order 110): 3330,-2800 2970,-2800 2970,-2445 3330,-2445
V3 on Bottom Layer "Bottom Layer-V3" (solid, pour order 54): 1430,-1970 1430,-2420 1165,-2420 1165,-1970
V3 on Bottom Layer "Bottom Layer-V3 1" (solid, pour order 46): 255,-1775 1430,-1775 1430,-1970 255,-1970
1_GND on Bottom Layer "Bottom Layer-1_GND 1" (solid, pour order 64): 660,-2010 1020,-2010 1020,-2365 660,-2365
V3 on Bottom Layer "Bottom Layer-V3 2" (solid, pour order 50): 500,-2645 1430,-2645 1430,-2420 500,-2420
no net on Bottom Layer "Bottom Layer-No Net 1" (solid, pour order 52): 1430,-1970
V3 on Bottom Layer "Bottom Layer-V3 3" (solid, pour order 48): 255,-1970 500,-1970 500,-2645 260,-2645
+VIN_1_1 on Bottom Layer "Bottom Layer-+VIN_1" (solid, pour order 12): 2620,-995 2620,-235 2750,-235 2750,-995
+VIN_1 on Bottom Layer "Bottom Layer-+VIN_1" (solid, pour order 8): 1290,-370 1290,-1130 1160,-1130 1160,-370
GND on Bottom Layer "Bottom Layer-GND" (solid, pour order 20): 3340,-595 2955,-595 2955,-915 3340,-915
+VIN_1_1 on Bottom Layer "Bottom Layer-+VIN_1 1" (solid, pour order 14): 3680,-1185 3680,-235 3465,-235 3465,-1185
+VIN_1_1 on Bottom Layer "Bottom Layer-+VIN_1 3" (solid, pour order 18): 3465,-1185 2620,-1185 2620,-995 3465,-995
+VIN_1_1 on Bottom Layer "Bottom Layer-+VIN_1 2" (solid, pour order 16): 2750,-235 3465,-235 3465,-335 2750,-335
GND on Bottom Layer "Bottom Layer-GND" (solid, pour order 0): 920,-500 535,-500 535,-820 920,-820
+VIN_1 on Bottom Layer "Bottom Layer-+VIN_1 1" (solid, pour order 2): 230,-180 230,-1130 445,-1130 445,-180
+VIN_1 on Bottom Layer "Bottom Layer-+VIN_1 2" (solid, pour order 10): 1160,-1130 445,-1130 445,-1030 1160,-1030
no net on Bottom Layer "Bottom Layer-No Net" (solid, pour order 6): 1235,-370
+VIN_1 on Bottom Layer "Bottom Layer-+VIN_1 3" (solid, pour order 4): 445,-180 1290,-180 1290,-370 445,-370
V4 on Top Layer "Top Layer-V4" (solid, pour order 60): 240,-2825 1665,-2825 1665,-2650 1660,-2650 240,-2650
V2 on Top Layer "Top Layer-V2" (solid, pour order 116): 3750,-1985 2325,-1985 2325,-2160 2330,-2160 3750,-2160
V2 on Top Layer "Top Layer-V2 1" (solid, pour order 118): 2325,-2160 2325,-3095 2515,-3095 2515,-2160
V2 on Top Layer "Top Layer-V2 2" (solid, pour order 122): 3925,-3270 3750,-3270 3750,-1985 3925,-1985
V2 on Top Layer "Top Layer-V2 3" (solid, pour order 120): 3750,-3270 2325,-3270 2325,-3095 3750,-3095
V4 on Top Layer "Top Layer-V4 1" (solid, pour order 62): 1665,-2650 1665,-1715 1475,-1715 1475,-2650
V4 on Top Layer "Top Layer-V4 2" (solid, pour order 58): 240,-1540 1665,-1540 1665,-1715 240,-1715
V4 on Top Layer "Top Layer-V4 3" (solid, pour order 56): 65,-1540 240,-1540 240,-2825 65,-2825
+VIN_2 on Top Layer "Top Layer-+VIN_2" (solid, pour order 44): 1550,-1285 1545,-1290 1360,-1290 1360,0 1545,0
+VIN_2 on Top Layer "Top Layer-+VIN_2 1" (solid, pour order 42): 1360,-1290 0,-1290 0,-1140 1360,-1140
+VIN_2 on Top Layer "Top Layer-+VIN_2 2" (solid, pour order 40): 0,-1140 0,0 150,0 155,0 155,-1140
+VIN_2 on Top Layer "Top Layer-+VIN_2 3" (solid, pour order 38): 155,0 1360,0 1360,-155 155,-155
+VIN_2_1 on Top Layer "Top Layer-+VIN_2_1 1" (solid, pour order 28): 3755,-1365 2550,-1365 2550,-1210 3755,-1210
+VIN_2_1 on Top Layer "Top Layer-+VIN_2_1 2" (solid, pour order 26): 3910,-225 3910,-1365 3760,-1365 3755,-1365 3755,-225
+VIN_2_1 on Top Layer "Top Layer-+VIN_2_1 3" (solid, pour order 24): 2550,-75 3910,-75 3910,-225 2550,-225
+VIN_2_1 on Top Layer "Top Layer-+VIN_2_1" (solid, pour order 22): 2360,-80 2365,-75 2550,-75 2550,-1365 2365,-1365

## Silkscreen, mask and mechanical layers (free items; w line width, h text height)
Top Overlay:
  text "GND" at 1890,-250 h60
  text "V2" at 1895,-445 h60
  text "V1" at 1895,-550 h60
  text "Dont use this header" at 2180,-615 h60 r90
  text "SOU" at 1890,-655 h60
  text "VCC" at 1890,-745 h60
  text "GCK" at 1890,-855 h60
  text "SIN" at 1890,-945 h60
  text "SCK" at 1890,-1050 h60
  text "LAT" at 1895,-1150 h60
Board Outline:
  the board outline again, w5